# Altium PCB Part_2_PS_Controller.PcbDoc
Units mm, origin at the board's own origin, x right, y up, seen from the top; angles counter-clockwise.
Board outline 50 x 50 mm, 2 copper layers (Top Layer, Bottom Layer); 2 components, 36 nets, 31 pads, 0 vias.
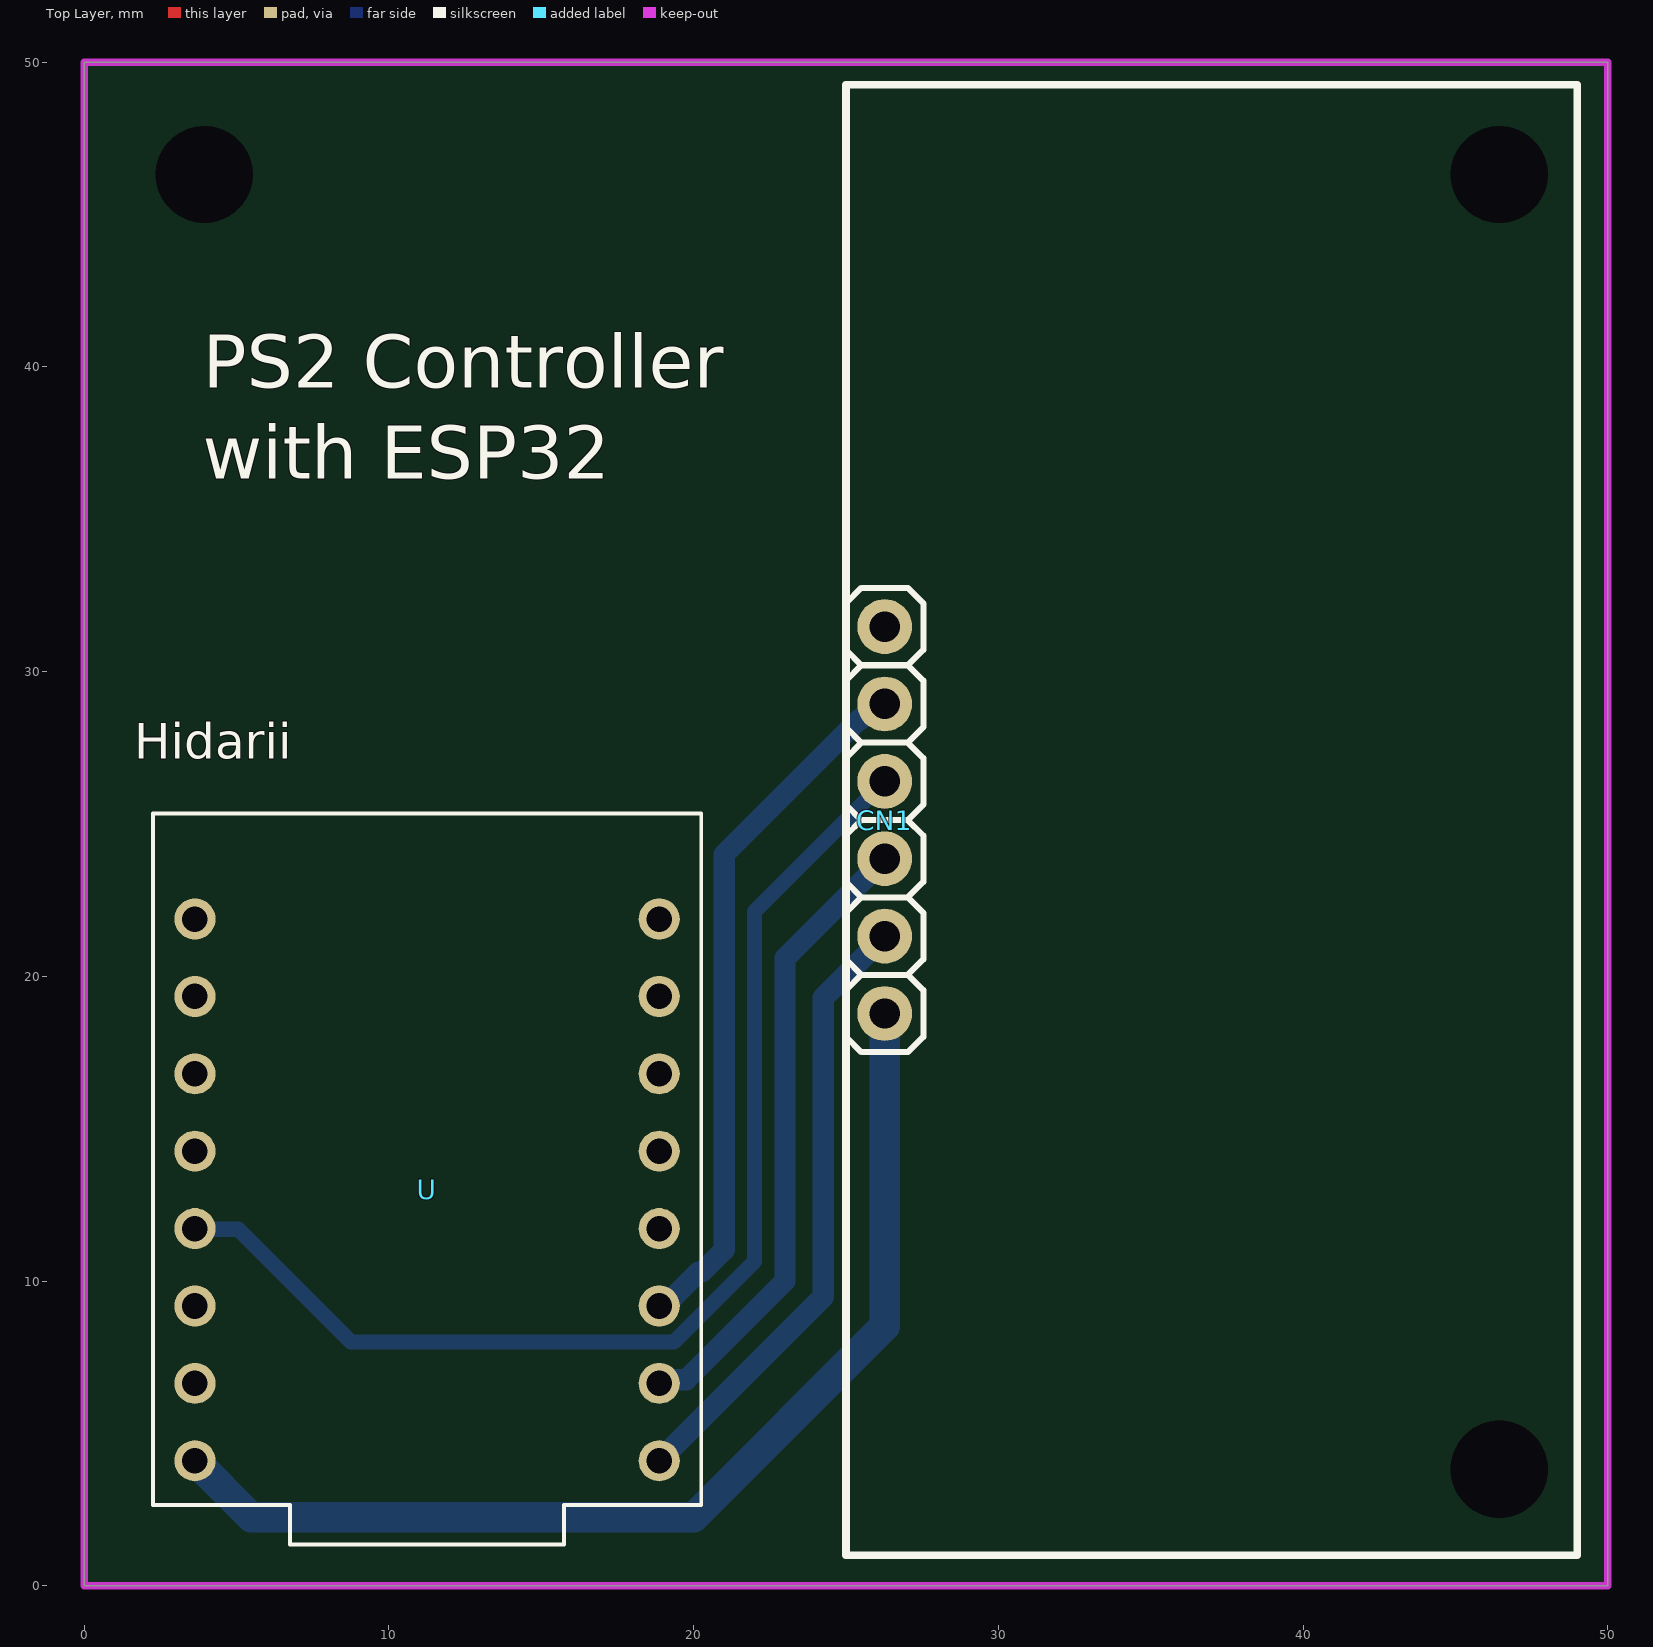
[diagram p0: Top Layer view]
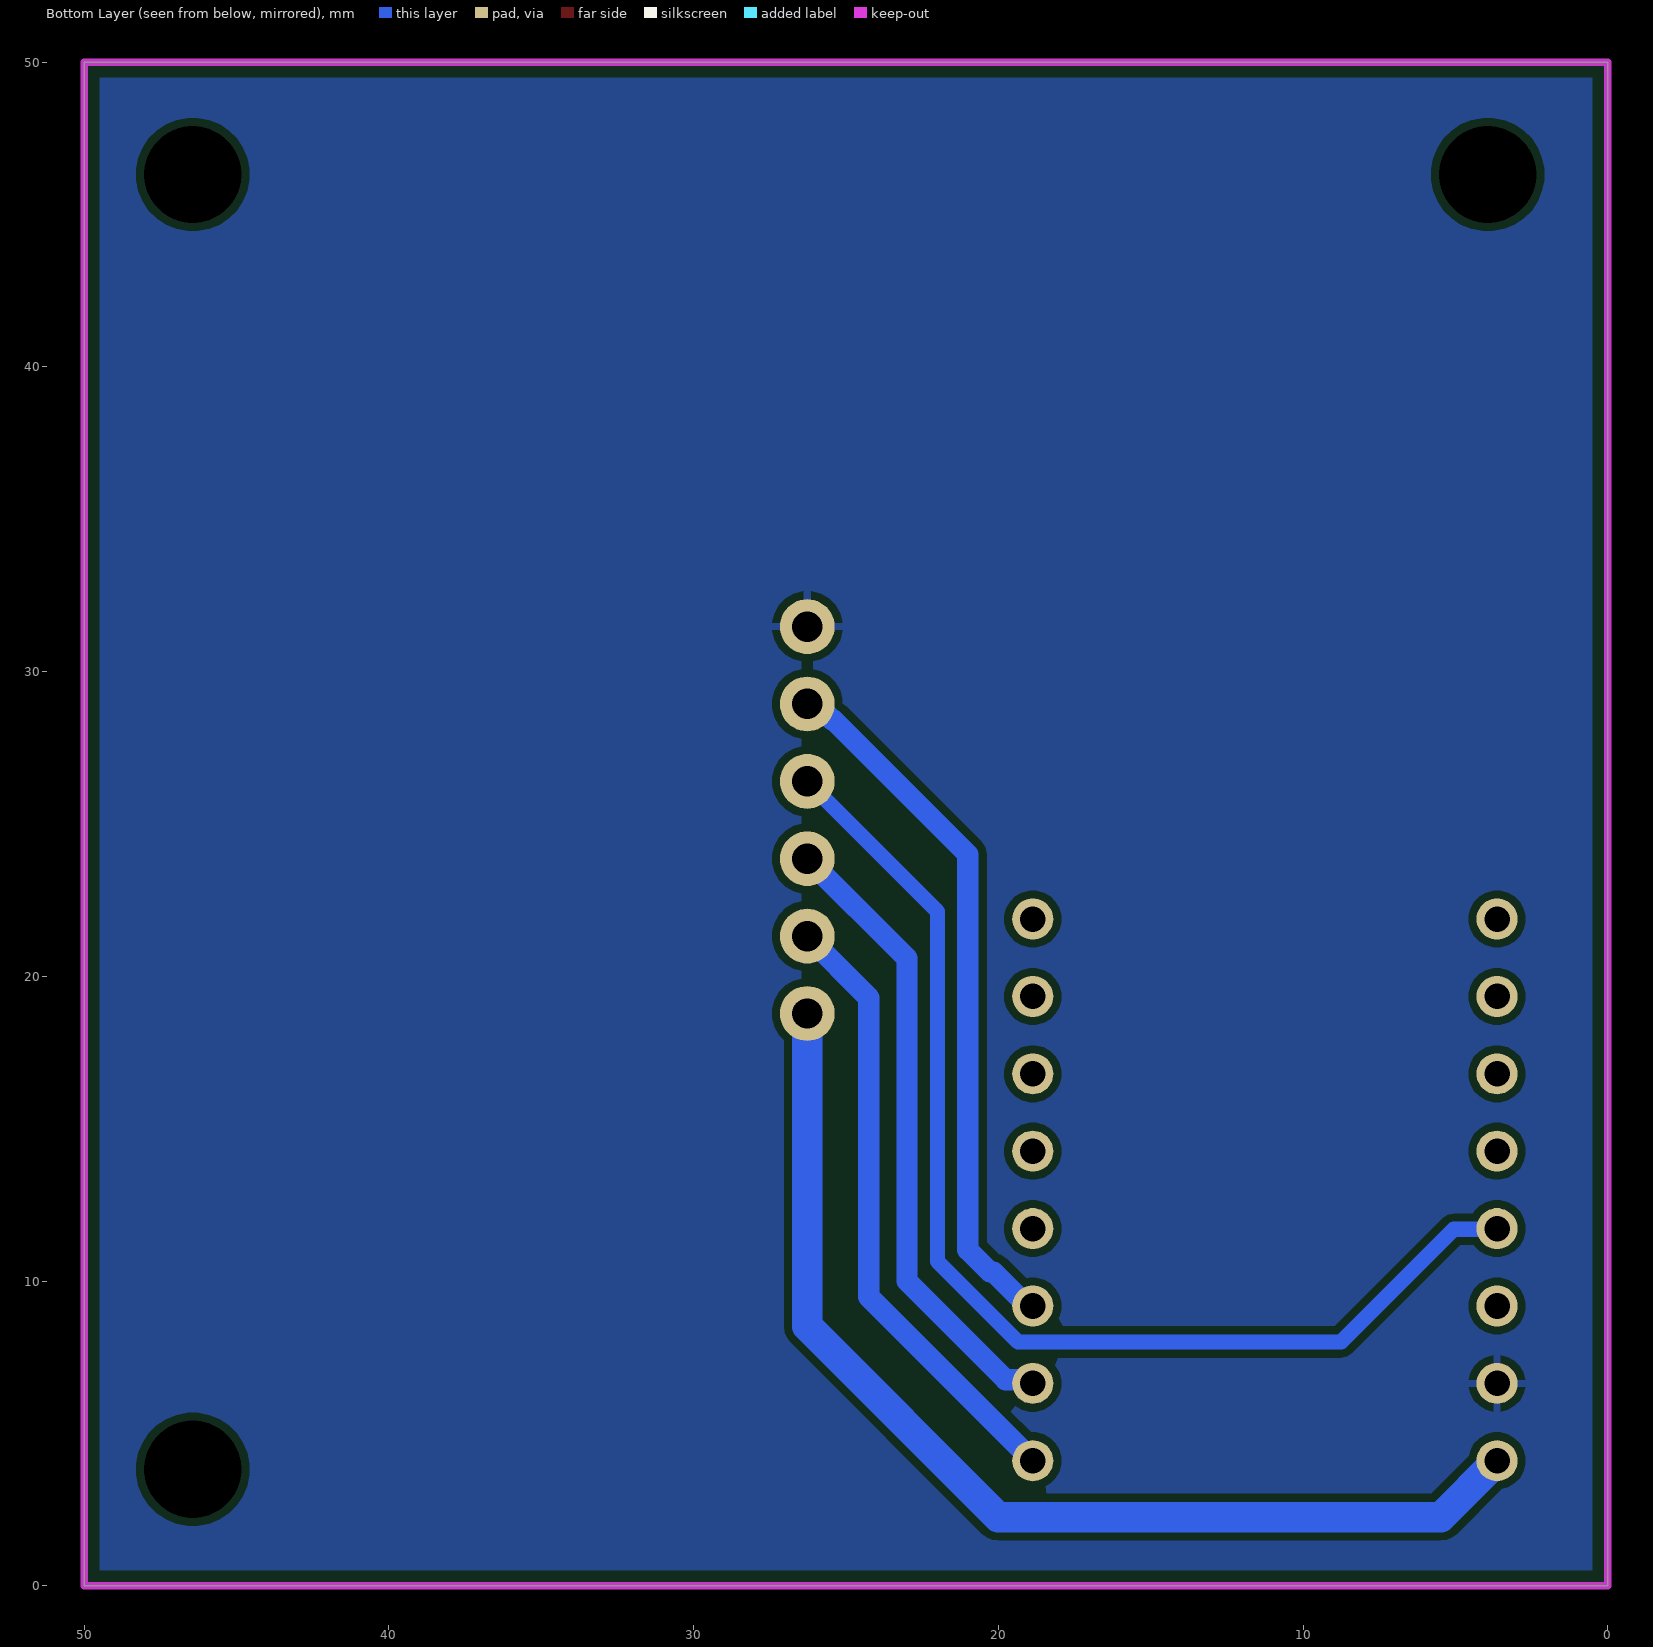
[diagram p1: Bottom Layer view, seen from below]

## Layer stack, top to bottom
Top Solder: solder mask 0.0102, Solder Resist, Dk 3.5
Top Layer: signal copper 0.0356
Dielectric 1: dielectric 0.32, FR-4, Dk 4.8
Bottom Layer: signal copper 0.0356
Bottom Solder: solder mask 0.0102, Solder Resist, Dk 3.5

## Board outline
0,0 0,50 50,50 50,0

## Design rules (kind name [scope] priority, off if disabled: settings)
Clearance [All] p1: gap=0.254 ignorepadtopadclearanceinfootprint=FALSE except(0: Arc-Hole Track-Hole SMDPad-Hole THPad-Hole Via-Hole Fill-Hole Poly-Hole Region-Hole Text-Hole)
PolygonConnect [All] p1: connectstyle=Relief reliefconductorwidth=0.254 reliefentries=4 polygonreliefangle="90 Angle" airgapwidth=0.254
RoutingVias [All] p1: holewidth=0.711 width=1.27 viastyle="Through Hole" minholewidth=0.711 minwidth=1.27 maxholewidth=0.711 maxwidth=1.27
SolderMaskExpansion [All] p1: expansion=0.102 istentingtop=FALSE
Width [All] p1: maxlimit=1.5 minlimit=0.254 preferedwidth=1 toplayer_maxwidth=0.254 toplayer_prefwidth=0.254 minimp=50.000000 maximp=50.000000 favimp=50.000000
30 further rules are at their usual default settings.

## Classes and differential pairs
component class Part_2_PS_Controller: CN1

## Components (designator, comment, footprint, x,y, rotation, side; value= is the part's Value field where it differs from the comment)
CN1 "CN_6P_Header 1 Row" HD6-2.54 26.27,18.78 r90 top
U "ESP32-C3_SUPERMINI_TH" MODULE_ESP32-C3_SUPERMINI_TH 11.25,14 r180 top (schematic designator U1)

## Footprints (in the part's own frame and the unit in brackets; to place one, negate y for a bottom-side part, rotate by r counter-clockwise, add the part's x,y. Pads: shape width x height; smd on the part's side, far side on the other; paste and mask are expansions set on the pad)
HD6-2.54 [mm]
  round 1.8 hole 1 mask+0.13: 1(0,0) 2(2.54,0) 3(5.08,0) 4(7.62,0) 5(10.16,0) 6(12.7,0)
  round 1 on Top Overlay mask+0.5: ""(0,0) ""(2.54,0) ""(5.08,0) ""(7.62,0) ""(10.16,0) ""(12.7,0)
  silkscreen extent -1.27,-1.27 13.97,1.27, body extent -1.27,-1.27 13.97,1.27, height 8.6
MODULE_ESP32-C3_SUPERMINI_TH [mm]
  round 1.348 hole 0.84: 0(7.62,-7.88) 1(7.62,-5.34) 2(7.62,-2.8) 3(7.62,-0.26) 3.3(7.62,4.82) 4(7.62,2.28) 5(-7.62,9.9) 5V(7.62,9.9) 6(-7.62,7.36) 7(-7.62,4.82) 8(-7.62,2.28) 9(-7.62,-0.26) 10(-7.62,-2.8) 20(-7.62,-5.34) 21(-7.62,-7.88) G(7.62,7.36)
  silkscreen extent -9,-11.35 9,12.65, body extent -9,-11.35 9,12.65, height 4.16

## Part data
CN1: "Jump Header 6P 1Row", 3.Part Name="Male Header 6P", 4.Value="Connector 6", 1.Type="Through Hole", 2.Category=Connector
U: "Super tiny ESP32-C3 board", Package=Package, Check_prices=https://www.snapeda.com/parts/ESP32-C3%20SuperMini_TH/Espressif+Systems/view-part/?ref=eda, MF="Espressif Systems", MP="ESP32-C3 SuperMini_TH", SnapEDA_Link=https://www.snapeda.com/parts/ESP32-C3%20SuperMini_TH/Espressif+Systems/view-part/?ref=snap

## Free pads (board coordinates)
  round 1.524 hole 3.2: 1(3.94,46.318) 1(46.44,3.818) 1(46.44,46.318)

## Nets (pads, with @x,y where several pads share a name; then routed paths per layer and width w, separated by ;. In a path a pad name is that pad's centre, name@x,y a point inside that pad or via, vN(x,y) a via of type N, cw(c..) or ccw(c..) an arc to the next point about the centre after c; other vN are vias at no path point)
+3V3: 
+5: CN1.1 U.5V | length 36.3
  Bottom Layer w1: U.5V 5.48,2.25 20,2.25 26.27,8.52 CN1.1
+12: 
+12M: 
Buzzer: 
GND: CN1.6 U.G
IN1A: 
IN1B: 
IN2A: 
IN2B: 
IR1: 
IR2: 
IR3: 
IR4: 
Light: 
MISO: CN1.2 U.5 | length 20.3
  Bottom Layer w0.7: U.5 24.25,9.48 24.25,19.3 CN1.2
MOSI: CN1.3 U.6 | length 20.7
  Bottom Layer w0.7: U.6 18.994,6.764 19.764,6.764 23,10 23,20.59 CN1.3
NetCN?_1: 
NetL?_1: 
NetQ?_1: 
NetR?_1: 
Phase1A: 
Phase1B: 
Phase2A: 
Phase2B: 
RST: 
RX: 
SCK: CN1.4 U.4 | length 38.5
  Bottom Layer w0.5: U.4 3.654,11.696 5.054,11.696 8.748,8.002 19.358,8.002 20.048,8.692 22,10.644 22,22.13 CN1.4
SCL: 
SDA: 
Servo1: 
Servo2: 
Servo3: 
Servo4: 
SS: CN1.5 U.7 | length 23.2
  Bottom Layer w0.7: U.7 19.045,9.18 20.159,10.294 20.273,10.294 21,11.021 21,24 25.426,28.426 25.458,28.426 25.972,28.94 CN1.5
TX: 
pads on no net: CN1. U.0 U.1 U.2 U.3 U.3.3 U.8 U.9 U.10 U.20 U.21

## Polygon pours and split planes (outlines as drawn)
GND on Bottom Layer "GND_L02_P000" (solid, remove dead copper, pour order 0): 0.5,49.5 0.5,0.5 49.5,0.5 49.5,49.5

## Keep-outs
Keep-Out Layer:
  the board outline again, w0.254

## Silkscreen, mask and mechanical layers (free items; w line width, h text height)
Top Overlay:
  lines w0.254: 25,1 25,49.26 49,49.26 49,1 25,1
  text "PS2 Controller / with ESP32" at 3.886,35.75 h3
  text "Hidarii" at 1.636,26.75 h2